# Altium PCB PCB_SEN.PcbDoc
Units mil, origin at the board's own origin, x right, y up, seen from the top; angles counter-clockwise.
Board outline 1181.1 x 866.14 mil, 2 copper layers (Top Layer, Bottom Layer), stack 65.792 mil thick; 11 components, 6 nets, 38 pads, 13 vias.
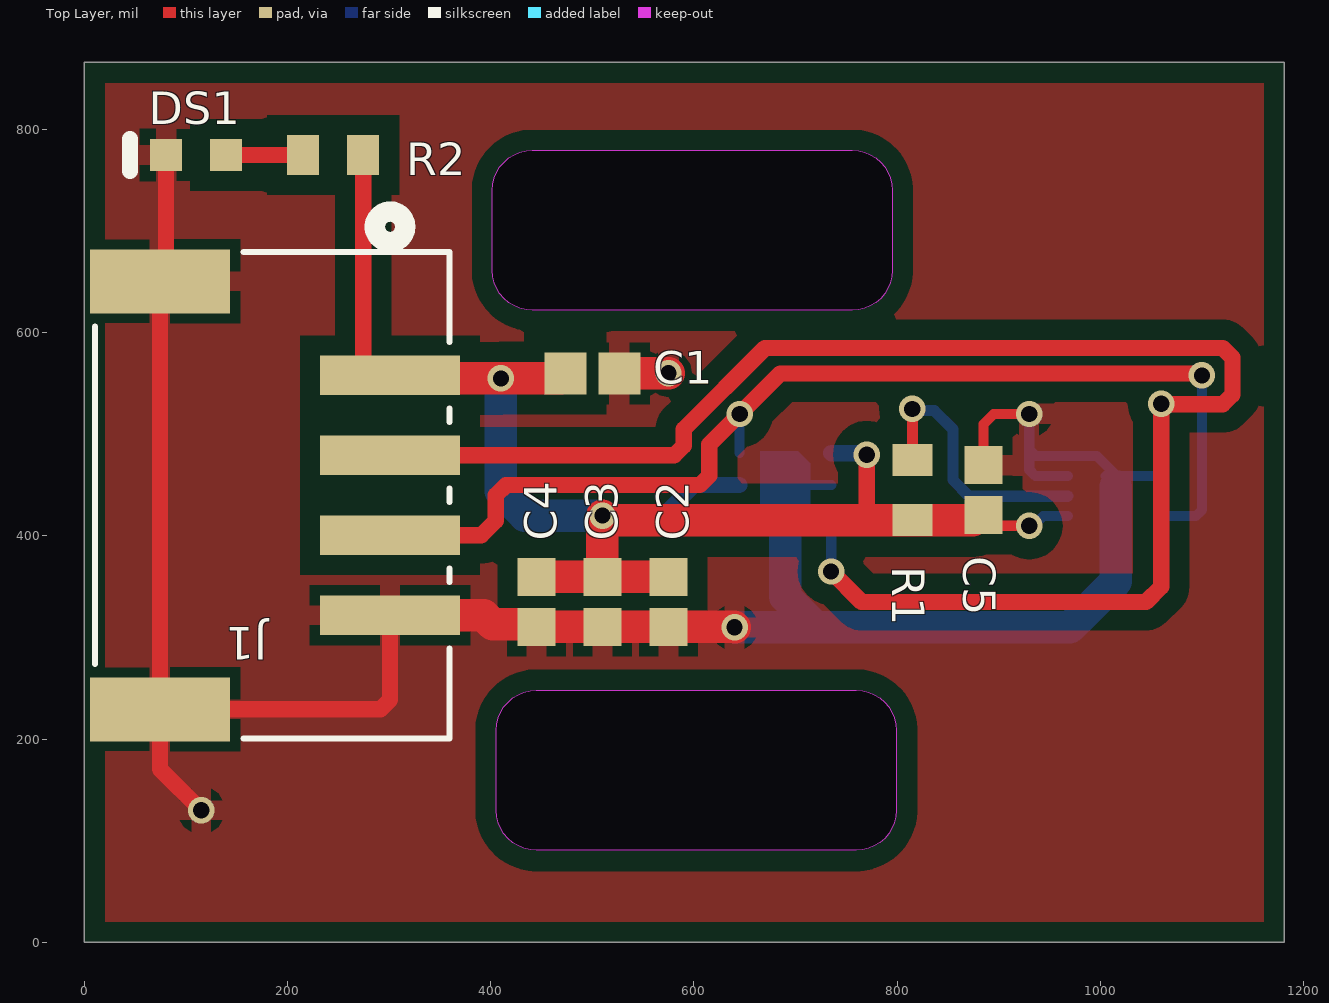
[diagram p0: Top Layer view]
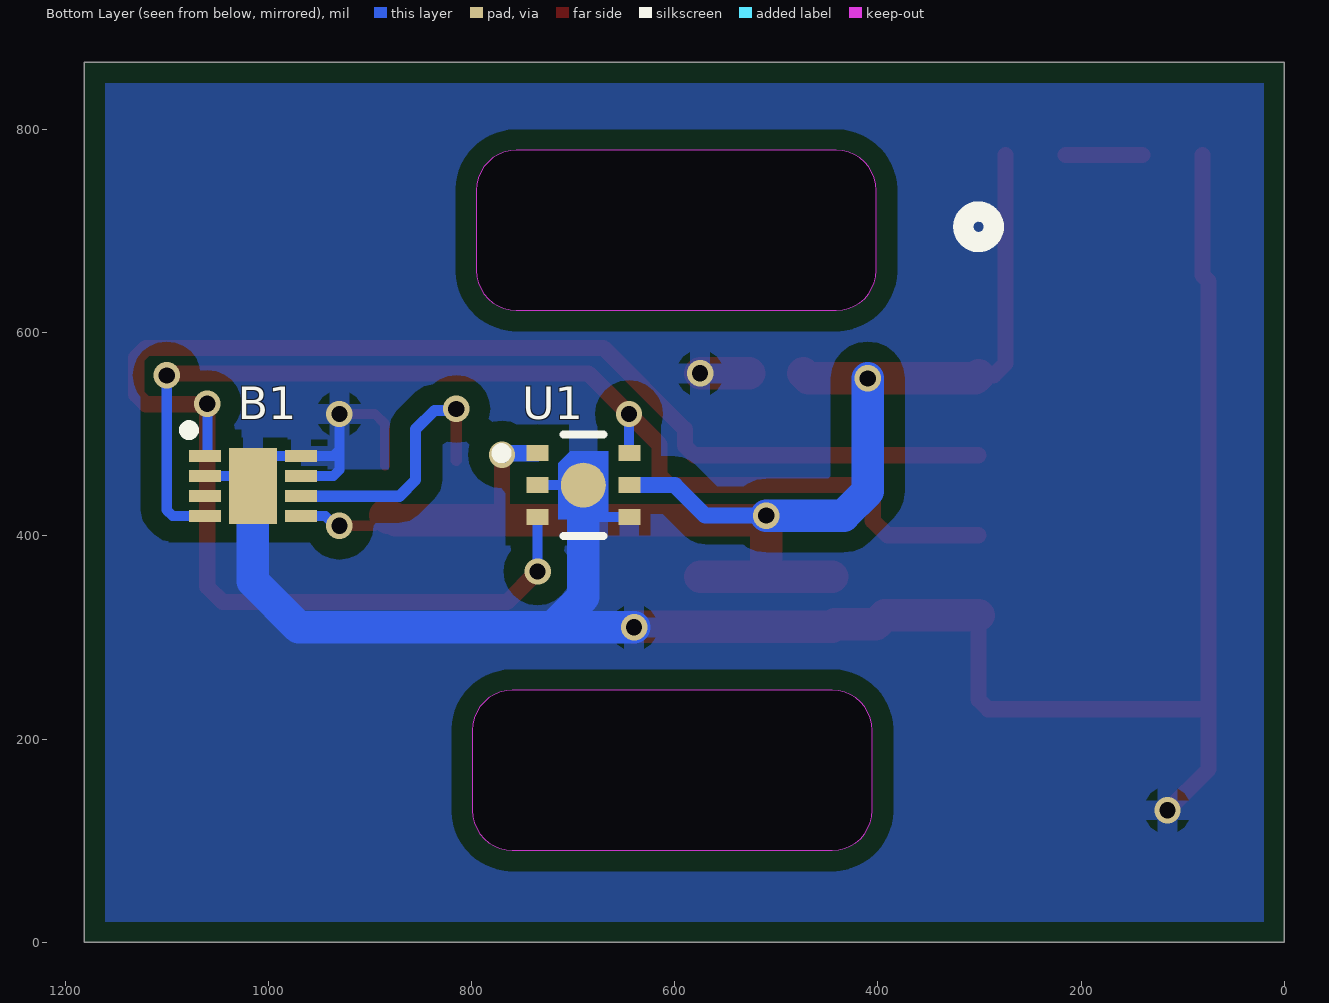
[diagram p1: Bottom Layer view, seen from below]
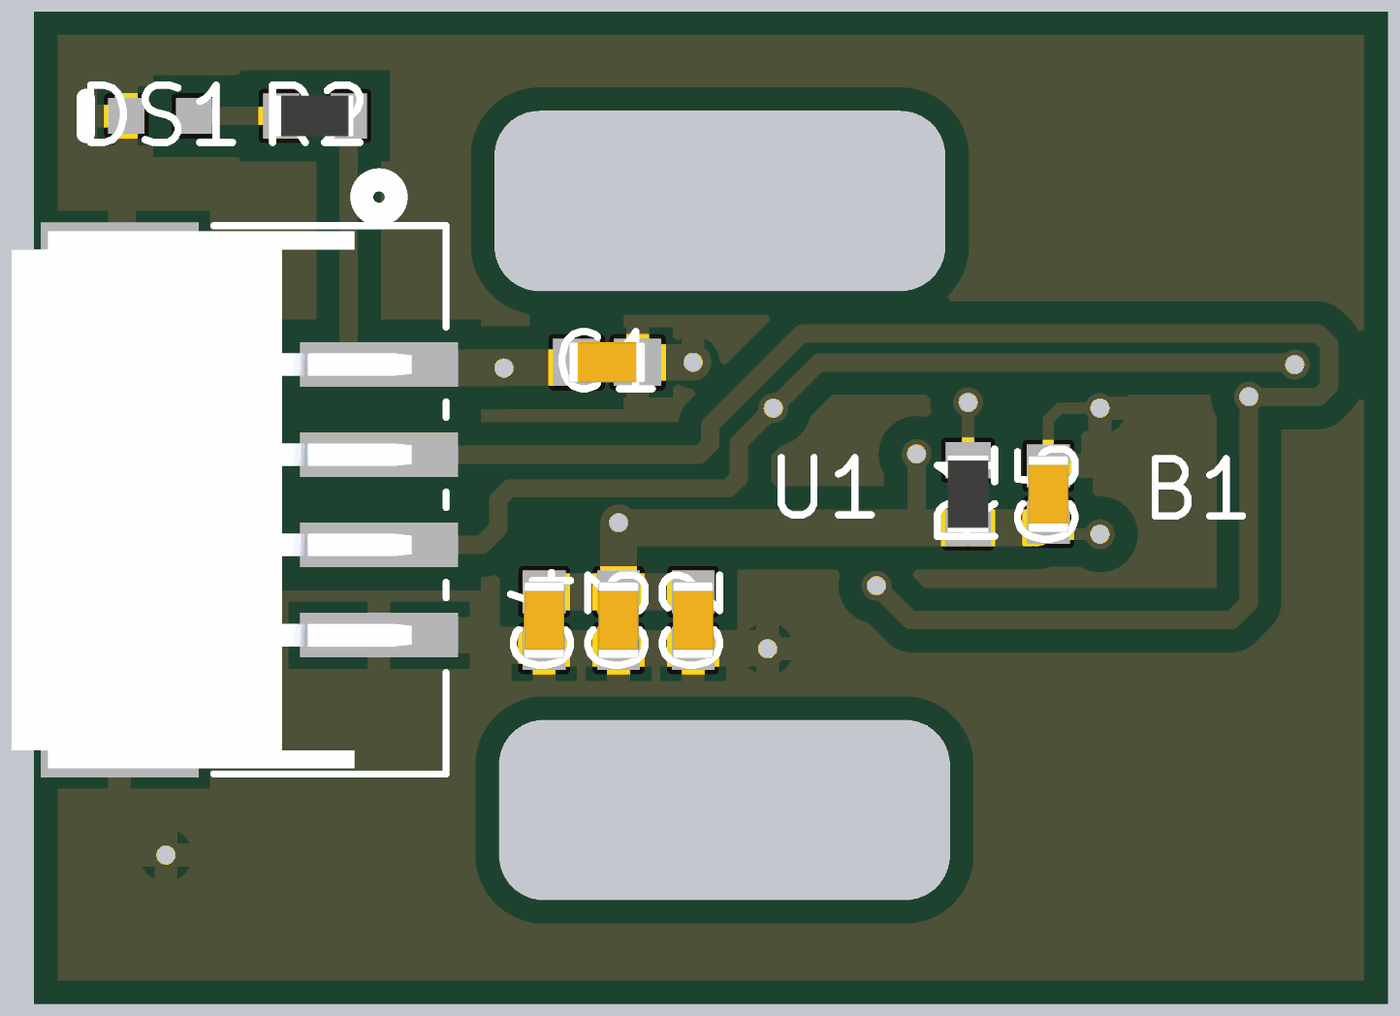
[diagram p2: 3D render of the assembled board from above, using the file's embedded part models]

## Layer stack, top to bottom
Top Solder: solder mask 0.4, Solder Resist, Dk 3.5
Top Layer: signal copper 1.4
Dielectric 1: dielectric 62.9921, FR-4, Dk 4.8
Bottom Layer: signal copper 1.4
Bottom Solder: solder mask 0.4, Solder Resist, Dk 3.5

## Board outline
0,0 1181.1,0 1181.1,866.14 0,866.14
cut-out: 405.51,129.92 405.51,208.66 cw(c444.88,208.66) 444.88,248.03 759.84,248.03 cw(c759.84,208.66) 799.21,208.66 799.21,129.92 cw(c759.84,129.92) 759.84,90.55 444.88,90.55 cw(c444.88,129.92)
cut-out: 401.57,661.42 401.57,740.16 cw(c440.94,740.16) 440.94,779.53 755.91,779.53 cw(c755.91,740.16) 795.28,740.16 795.28,661.42 cw(c755.91,661.42) 755.91,622.05 440.94,622.05 cw(c440.94,661.42)

## Design rules (kind name [scope] priority, off if disabled: settings)
BoardOutlineClearance [All] p1: gap=20
Clearance Clearance_1 [All] p1: gap=6 except(20: Arc-Poly Track-Poly SMDPad-Poly THPad-Poly Via-Poly Fill-Poly Poly-Poly Poly-Region Poly-Text)
Clearance [InNet('GND')] p2: gap=6 except(20: Arc-Poly Arc-Region Track-Poly Track-Region SMDPad-Poly SMDPad-Region THPad-Poly THPad-Region Via-Poly Via-Region Fill-Poly Fill-Region Poly-Poly Poly-Region Poly-Text Region-Region)
MinimumSolderMaskSliver [All] p1: minsoldermaskwidth=4
PolygonConnect [All] p1: connectstyle=Relief reliefconductorwidth=20 reliefentries=4 polygonreliefangle="90 Angle" airgapwidth=10
RoutingVias [All] p1: holewidth=28 width=56 viastyle="Through Hole" minholewidth=10 minwidth=20 maxholewidth=16 maxwidth=30
SilkToSilkClearance [All] p1: silktosilkclearance=4
SilkToSolderMaskClearance [IsPad] p1: minsilkscreentomaskgap=6 clearancetoexposedcopper=TRUE
SolderMaskExpansion [All] p1: expansion=4
Width [All] p1: maxlimit=100 minlimit=10 preferedwidth=16
27 further rules are at their usual default settings.

## Components (designator, comment, footprint, x,y, rotation, side; value= is the part's Value field where it differs from the comment)
B1 "SHT30-DIS-F-2.5KS" SON50P250X250X100-9N-D 1015.16,449.06 r180 bottom
C1 "Capacitor 100 nF +/-10% 50 V 0603" CAPC1608X90X40ML10T20 500,560 r0 top
C2 "Capacitor 100 nF +/-10% 50 V 0603" CAPC1608X90X40NL10T20 575,335 r270 top
C3 "Capacitor 100 nF +/-10% 50 V 0603" CAPC1608X90X40NL10T20 510,335 r270 top
C4 "Capacitor 100 nF +/-10% 50 V 0603" CAPC1608X90X40NL10T20 445,335 r270 top
C5 "Capacitor 100 nF +/-10% 50 V 0603" CAPC1608X90X40NL10T20 885,445 r90 top
DS1 "LTW-C191TS5" LTST-LTW-C191TS5_V 110,775 r180 top
J1 "S4B-PH-SM4-TBLFSN" CONN_S4B-PH-SM4-TBLFSN_JST 185,440 r90 top
R1 "Resistor 10k +/-1% 0603 100 mW" RESC1608X55X25ML10T15 815,445 r270 top
R2 "Resistor 10k +/-1% 0603 100 mW" RESC1608X55X25ML10T15 245,775 r180 top
U1 "SGP40-D-R4" FP-SGP40-D-R4-MFG 690,450 r180 bottom

## Footprints (in the part's own frame and the unit in brackets; to place one, negate y for a bottom-side part, rotate by r counter-clockwise, add the part's x,y. Pads: shape width x height; smd on the part's side, far side on the other; paste and mask are expansions set on the pad)
CAPC1608X90X40ML10T20 [mm] "Chip Capacitor, 2-Leads, Body 1.70x0.90mm, IPC Low Density"
  rect 1.05x1.05 smd: 1(-0.675,0) 2(0.675,0)
  body extent -0.85,-0.45 0.85,0.45, height 0.9
CAPC1608X90X40NL10T20 [mm] "Chip Capacitor, 2-Leads, Body 1.70x0.90mm, IPC Medium Density"
  rect 0.95x0.95 smd: 1(-0.625,0) 2(0.625,0)
  body extent -0.85,-0.45 0.85,0.45, height 0.9
CONN_S4B-PH-SM4-TBLFSN_JST [mil]
  rect 39x138 smd paste+0 mask+0: 1(118.11,-115.93) 2(39.37,-115.93) 3(-39.37,-115.93) 4(-118.11,-115.93)
  rect 63x138 smd paste+0 mask+0: 5(-210.63,110.44) 6(210.63,110.44)
  silkscreen extent -239,-175 279,174, body extent -234,-144 234,205, height 215
FP-SGP40-D-R4-MFG [mm]
  rect 0.55x0.4 smd paste+0 mask+0: 1(-1.15,0.8) 2(-1.15,0) 3(-1.15,-0.8) 4(1.15,-0.8) 5(1.15,0) 6(1.15,0.8)
  round 1.125 smd paste-1000 mask+0: 7(0,0)
  Top Layer region: -0.625,-0.85 0.625,-0.85 0.625,0.85 -0.325,0.85 -0.625,0.55
  silkscreen extent -2.17,-1.27 0.5,1.27, body extent -1.22,-1.22 1.22,1.22, height 0.95
LTST-LTW-C191TS5_V [mm] "SMD, 2-Leads, Body 1.6x0.8mm"
  rect 0.8x0.8 smd: 1(-0.75,0) 2(0.75,0)
  silkscreen extent 1.65,-0.4 1.65,0.4, body extent -0.8,-0.4 0.8,0.4, height 0.65
RESC1608X55X25ML10T15 [mm] "Chip Resistor, 2-Leads, Body 1.70x0.90mm, IPC Low Density"
  rect 0.8x1 smd: 1(-0.75,0) 2(0.75,0)
  body extent -0.85,-0.45 0.85,0.45, height 0.55
SON50P250X250X100-9N-D [mm]
  rect 0.8x0.3 smd: 1(-1.2,0.75) 2(-1.2,0.25) 3(-1.2,-0.25) 4(-1.2,-0.75) 5(1.2,-0.75) 6(1.2,-0.25) 7(1.2,0.25) 8(1.2,0.75)
  rect 1.2x1.9 smd: 9(0,0)
  silkscreen extent -1.73,1.28 -1.48,1.52, body extent -1.3,-1.25 1.3,1.25, height 1

## Part data
B1: "Humidity and Temperature Sensor"
C1 C2 C3 C4 C5: library part CMP-001-00017-6, "Chip Capacitor, 100 nF, +/- 10%, 50 V, 0603 (1608 Metric)"
DS1: library part CMP-007-00027-2, "LED Uni-Color White, 70 mW, 20 mA, -20 to 80 degC, 2-Pin SMD, RoHS, Tape and Reel"
J1: "No Description Available"
R1 R2: library part CMP-009-00017-5, "Chip Resistor, 10 KOhm, +/- 1%, 01 W, -55 to 155 degC, 0603 (1608 Metric)"
U1: library part CMP-144026-000004-1, "AIR QUALITY GAS SENSOR FOR VOC'S"

## Via types
v1: diameter 26, hole 16, Top Layer to Bottom Layer, tented both sides, 13 vias

## Nets (pads, with @x,y where several pads share a name; then routed paths per layer and width w, separated by ;. In a path a pad name is that pad's centre, name@x,y a point inside that pad or via, vN(x,y) a via of type N, cw(c..) or ccw(c..) an arc to the next point about the centre after c; other vN are vias at no path point)
3V3: B1.5 C1.1 C2.1 C3.1 C4.1 C5.1 J1.1 R1.2 R2.1 U1.1 U1.5 | length 1541
  Top Layer w10: C5.1 895.39,410 v1(930,410)
  Top Layer w16: R2.1 274.53,569.61 286.03,558.11 J1.1 ; 770,415.47 v1(770,480)
  Top Layer w32: J1.1 304.04,555 v1(410,555) 410.33,555.33 468.76,555.33 C1.1 ; C4.1 C3.1 ; C2.1 C3.1 ; C5.1 882.3,417.69 876.9,417.69 874.68,415.47 R1.2 770,415.47 514.53,415.47 v1(510,420) C3.1
  Bottom Layer w10: v1(930,410) 934.33,410 943.86,419.53 B1.5
  Bottom Layer w16: v1(510,420) 570,420 600,450 U1.5 ; U1.1 735.4,481.37 768.63,481.37 v1(770,480)
  Bottom Layer w32: v1(410,555) 410,443.75 433.75,420 v1(510,420)
GND: B1.2 B1.7 B1.8 B1.9 C1.2 C2.2 C3.2 C4.2 C5.2 DS1.2 J1.4 J1.5 J1.6 U1.2 U1.4 U1.7 | length 2442
  Top Layer w10: C5.2 885,510 895,520 v1(930,520)
  Top Layer w16: DS1.2 80.47,656.55 J1.6 J1.5 ; v1(115,130) 74.56,170.44 J1.5 ; J1.4 300.93,238.74 291.56,229.37 J1.5
  Top Layer w32: J1.4 301.04,321.79 393.21,321.79 401.91,313.09 442.3,313.09 C4.2 C3.2 C2.2 639.61,310.39 v1(640,310) ; C1.2 v1(575,560)
  Bottom Layer w10: U1.4 688.5,418.5 690,420 ; U1.7 U1.2 ; v1(930,520) 930,485 ; B1.7 936.1,458.9 930,465 930,485 ; B1.9@1005.31,458.9 B1.9 ; B1.9@1015.16,459.96 996.54,478.58 B1.8 936.42,478.58 930,485 ; B1.9@1016.22,458.9 B1.2
  Bottom Layer w32: v1(640,310) 720,310 ; U1.7 690,420 690,340 720,310 ; B1.9 1015.16,355.16 970,310 720,310
NetDS1_1: DS1.1 R2.2 | length 75.9
  Top Layer w16: DS1.1 R2.2
RST: B1.6 R1.1 | length 267.7
  Top Layer w11: R1.1 v1(815,525)
  Bottom Layer w11: v1@815,523.5 836.5,523.5 855,505 855,455 870.95,439.06 967.76,439.06 B1.6
SCL: B1.4 J1.3 U1.6 | length 1109.7
  Top Layer w16: J1.3 390.63,400.63 405,415 405,440 415,450 605.63,450 615,459.37 615,490 684.91,559.91 1098.09,559.91 v1(1100,558)
  Bottom Layer w10: U1.6 644.86,481.63 644.86,519.86 v1(645,520) ; B1.4 1094.14,419.53 1100,425.39 v1(1100,558)
SDA: B1.1 J1.2 U1.3 | length 1627.4
  Top Layer w16: J1.2 580.63,479.37 590,488.74 590,505 670,585 1120.63,585 1130,575.63 1130,539.02 1120.63,529.65 1060.35,529.65 v1(1060,530) 1060,350 1045,335 765,335 v1(735,365)
  Bottom Layer w10: v1(735,365) 735.14,365.14 735.14,418.37 U1.3 ; v1(1060,530) 1060,479.49 1060.91,478.58 B1.1
pads on no net: B1.3

## Polygon pours and split planes (outlines as drawn)
GND on Bottom Layer "GND_L02_P000" (solid, pour order 0): 0,0 1181.1,0 1181.1,866.14 0,866.14
GND on Top Layer "GND_L01_P001" (solid, pour order 1): 0,0 1181.1,0 1181.1,866.14 0,866.14

## Silkscreen, mask and mechanical layers (free items; w line width, h text height)
Mechanical 1:
  lines w4: 0,0 1181.1,0 1181.1,866.14 0,866.14 0,0 ; 401.57,661.42 ccw(c440.94,661.42) 440.94,622.05 755.91,622.05 ccw(c755.91,661.42) 795.28,661.42 795.28,740.16 ccw(c755.91,740.16) 755.91,779.53 440.94,779.53 ccw(c440.94,740.16) 401.57,740.16 401.57,661.42 ; 405.51,129.92 ccw(c444.88,129.92) 444.88,90.55 759.84,90.55 ccw(c759.84,129.92) 799.21,129.92 799.21,208.66 ccw(c759.84,208.66) 759.84,248.03 444.88,248.03 ccw(c444.88,208.66) 405.51,208.66 405.51,129.92
  lines w10: 0,0 0,866.14 1181.1,866.14 1181.1,0 0,0 ; 401.57,661.42 ccw(c440.94,661.42) 440.94,622.05 755.91,622.05 ccw(c755.91,661.42) 795.28,661.42 795.28,740.16 ccw(c755.91,740.16) 755.91,779.53 440.94,779.53 ccw(c440.94,740.16) 401.57,740.16 401.57,661.42 ; 405.51,129.92 ccw(c444.88,129.92) 444.88,90.55 759.84,90.55 ccw(c759.84,129.92) 799.21,129.92 799.21,208.66 ccw(c759.84,208.66) 759.84,248.03 444.88,248.03 ccw(c444.88,208.66) 405.51,208.66 405.51,129.92